# Altium PCB pmu.PcbDoc
Units mil, origin at the board's own origin, x right, y up, seen from the top; angles counter-clockwise.
Board outline 1870 x 900 mil, 2 copper layers (Top Layer, Bottom Layer); 17 components, 11 nets, 44 pads, 0 vias.
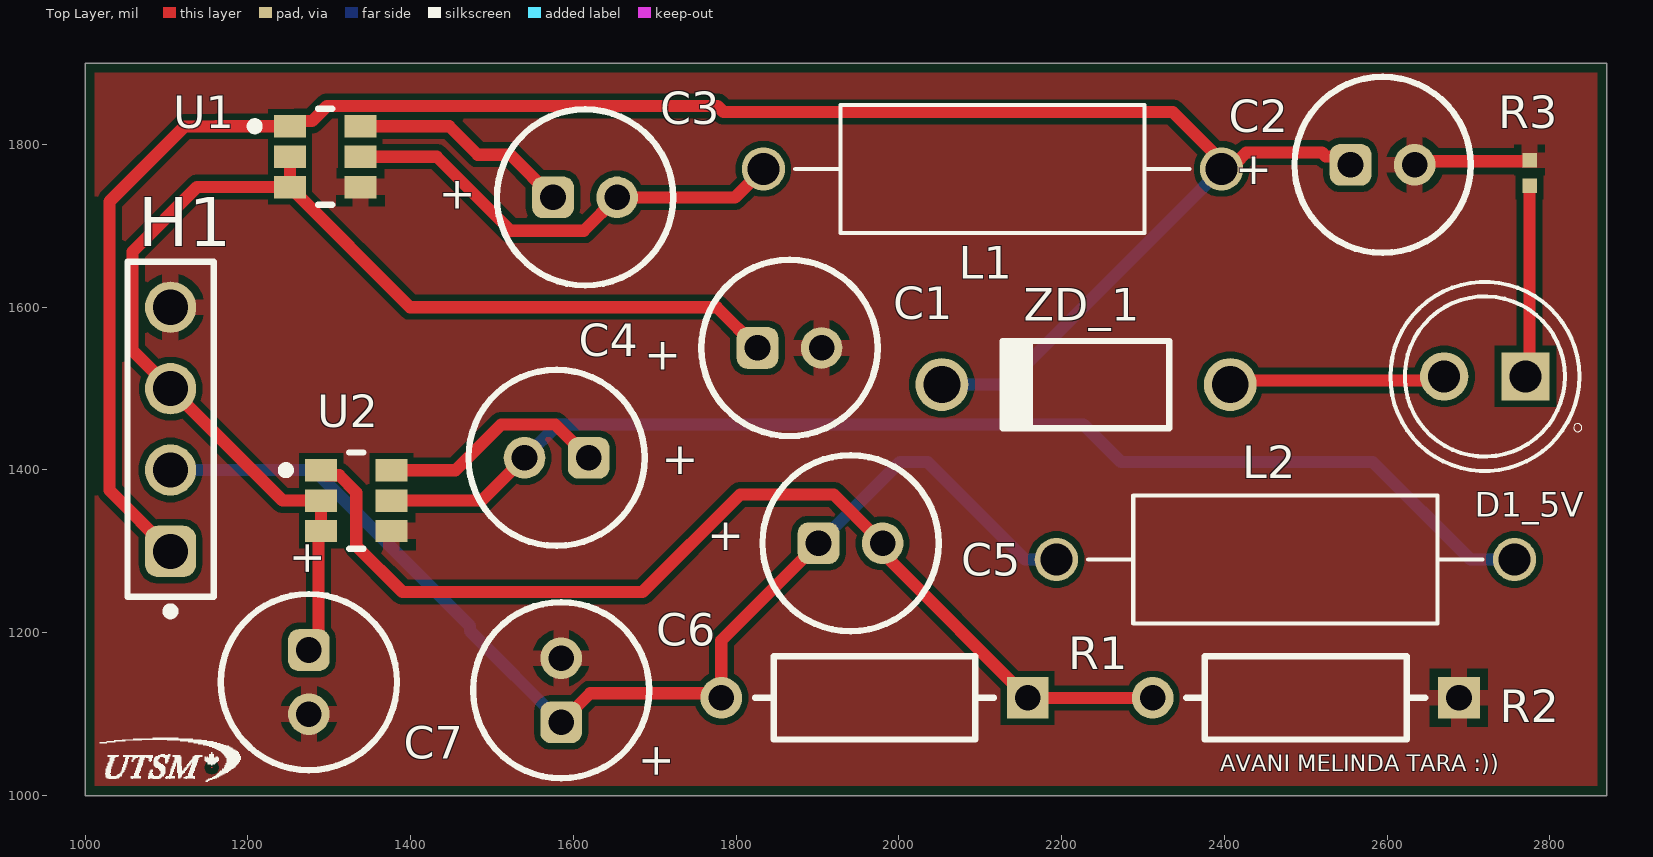
[diagram p0: Top Layer view]
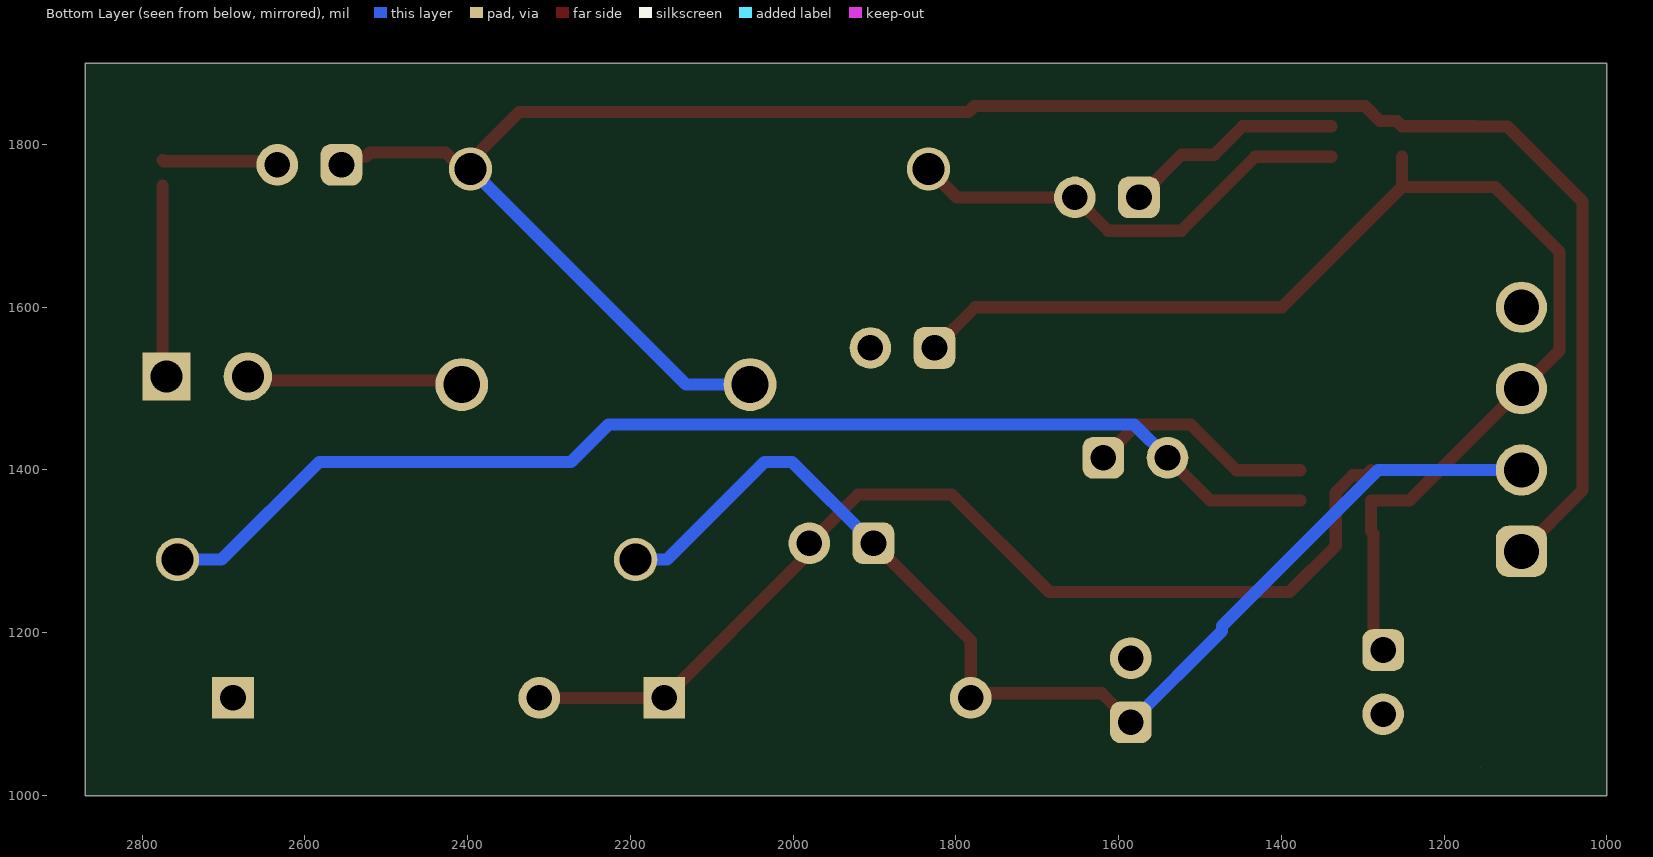
[diagram p1: Bottom Layer view, seen from below]

## Layer stack, top to bottom
Top Solder: solder mask 0.4, Solder Resist, Dk 3.5
Top Layer: signal copper 1.4
Dielectric 1: dielectric 12.6, FR-4, Dk 4.8
Bottom Layer: signal copper 1.4
Bottom Solder: solder mask 0.4, Solder Resist, Dk 3.5

## Board outline
1000,1000 2870,1000 2870,1900 1000,1900

## Design rules (kind name [scope] priority, off if disabled: settings)
BoardOutlineClearance [All] p1: gap=11.81 ignorepadtopadclearanceinfootprint=FALSE except(15.75: Arc-SplitBarrior Arc-SplitContinuation Track-SplitBarrior Track-SplitContinuation SMDPad-SplitBarrior SMDPad-SplitContinuation THPad-SplitBarrior THPad-SplitContinuation Via-SplitBarrior Via-SplitContinuation Fill-SplitBarrior Fill-SplitContinuation Poly-SplitBarrior Poly-SplitContinuation Region-SplitBarrior Region-SplitContinuation Text-SplitBarrior Text-SplitContinuation)
Clearance "Clearance Different Nets" [All] p1: gap=7.87 ignorepadtopadclearanceinfootprint=FALSE except(3.5: Arc-Arc Arc-Track Arc-SMDPad Track-Track Track-SMDPad; 5: SMDPad-SMDPad SMDPad-Via THPad-Via Via-Via; 10: Arc-Via Arc-Text Track-Via Track-Text SMDPad-Text THPad-Text Via-Text Fill-Text Poly-Text Region-Text Text-Text; 19.68: THPad-THPad Via-Hole)
Clearance "Clearance Same Nets" [All] p2: gap=7.87 ignorepadtopadclearanceinfootprint=FALSE except(3.5: Arc-Arc Arc-Track Arc-SMDPad Track-Track Track-SMDPad SMDPad-SMDPad; 5: SMDPad-Via THPad-Via; 10: Arc-Via Arc-Text Track-Via Track-Text SMDPad-Text THPad-Text Via-Via Via-Text Fill-Text Poly-Text Region-Text Text-Text)
Clearance "Clearance Bottom Layer" [OnLayer('Bottom Layer')] p3: gap=8 ignorepadtopadclearanceinfootprint=TRUE except(10: Arc-Text Track-Text SMDPad-Text THPad-Text Via-Text Fill-Text Poly-Text Region-Text Text-Text)
Clearance "Clearance Top Layer" [OnLayer('Top Layer')] p4: gap=8 ignorepadtopadclearanceinfootprint=TRUE except(10: Arc-Text Track-Text SMDPad-Text THPad-Text Via-Text Fill-Text Poly-Text Region-Text Text-Text)
HoleSize [All] p1: absolutevalues=TRUE maxlimit=248.03 minlimit=7.87 maxpercent=80.000 minpercent=20.000
MinimumAnnularRing [All] p1: minimumring=5.12
MinimumSolderMaskSliver [All] p1: minsoldermaskwidth=3.94
PolygonConnect PolygonConnect_1 [All] p1: thpad.connectstyle=Relief thpad.reliefconductorwidth=20 thpad.reliefentries=4 thpad.polygonreliefangle="90 Angle" thpad.airgapwidth=10 smdpad.connectstyle=Relief smdpad.reliefconductorwidth=20 smdpad.reliefentries=4 smdpad.polygonreliefangle="90 Angle" smdpad.airgapwidth=10 via.connectstyle=Direct via.reliefconductorwidth=20 via.reliefentries=4 via.polygonreliefangle="90 Angle" via.airgapwidth=10
RoutingCorners [All] p1: cornerstyle=Round minsetback=100 maxsetback=100
RoutingVias [All] p1: holewidth=19.68 width=39.37 viastyle="Through Hole" minholewidth=7.87 minwidth=13.78 maxholewidth=39.37 maxwidth=78.74
SilkToSilkClearance [All] p1: silktosilkclearance=3.94
SilkToSolderMaskClearance [IsPad] p1: minsilkscreentomaskgap=3.94 clearancetoexposedcopper=TRUE
SolderMaskExpansion [All] p1: expansion=4 istentingtop=FALSE
SupplyNets "Schematic Supply Nets" [InNet('GND')] p1: voltage=0.000
Width [All] p1: maxlimit=100 minlimit=3.5 preferedwidth=15
25 further rules are at their usual default settings.

## Components (designator, comment, footprint, x,y, rotation, side; value= is the part's Value field where it differs from the comment)
C1 "860020672005" WCAP-ATG5_D5H11 -48134.37,-48450 r180 top
C2 "860020672005" WCAP-ATG5_D5H11 -47405.63,-48225 r180 top
C3 "860020672005" WCAP-ATG5_D5H11 -48385.63,-48265 r180 top
C4 "860020672005" WCAP-ATG5_D5H11 51579.37,51415 r0 top
C5 "860020672005" WCAP-ATG5_D5H11 -48059.37,-48690 r180 top
C6 "860020672005" WCAP-ATG5_D5H11 51585,-48870.63 r270 top
C7 "860020672005" WCAP-ATG5_D5H11 -48725,51139.37 r90 top
D1_5V "WP7113ID" LED_WP7113ID 2720,1515 r180 top (schematic designator D1)
H1 "61300411121" 61300411121 1105,1450 r90 top locked
L1 "B78108E1472K009" INDAD1430W80L950D400 2115,1770 r0 top
L2 "B78108E1472K009" INDAD1430W80L950D400 2475,1290 r180 top
R1 "PCF14JT7K50" FP-CF14-MFG 1970,1120 r180 top
R2 "PCF14JT7K50" FP-CF14-MFG 2500,1120 r180 top
R3 "ERJ2GE0R00X" RESC1005X40X25LL05T05 2775,1765 r270 top
U1 "AP63205WU-7" FP-TSOT26-MFG 1295,1785 r0 top
U2 "AP63200WU-7" FP-TSOT26-MFG 1333.29,1362.4 r0 top
ZD_1 "1N4742A" FAIR-DO-41-2_V 2230,1505 r180 top

## Footprints (in the part's own frame and the unit in brackets; to place one, negate y for a bottom-side part, rotate by r counter-clockwise, add the part's x,y. Pads: shape width x height; smd on the part's side, far side on the other; paste and mask are expansions set on the pad)
61300411121 [mm] "Pin Header, pitch 2.54 mm, THT, Vertical, single row, 4p"
  rrect50% 1.6x1.6 hole 1.1: 1(-3.81,0)
  round 1.6 hole 1.1: 2(-1.27,0) 3(1.27,0) 4(3.81,0)
  silkscreen extent -5.8,-1.35 5.23,1.35, body extent -5.08,-1.27 5.08,1.27, height 8.57
FAIR-DO-41-2_V [mm] "2-Leads, Axial leaded, Body 2.72x5.2mm, Pin Spacing 9mm"
  round 1.65 hole 1.15: 1(-4.5,0) 2(4.5,0)
  silkscreen extent -2.6,-1.36 2.6,1.36, body extent -4.93,-1.36 4.93,1.36, height 2.71
FP-CF14-MFG [mm]
  rect 1.3x1.3 hole 0.8 paste-2539.97 mask+0: 1(-4.78,0)
  round 1.3 hole 0.8 paste-2539.97 mask+0: 2(4.78,0)
  silkscreen extent -3.73,-1.3 3.73,1.3, body extent -5.53,-1.4 5.53,1.4, height 0.25
FP-TSOT26-MFG [mm]
  rect 1x0.7 smd paste+0 mask+0: 1(-1.099,0.95) 2(-1.099,0) 3(-1.099,-0.95) 4(1.099,-0.95) 5(1.099,0) 6(1.099,0.95)
  silkscreen extent -2.32,-1.5 0.22,1.5, body extent -1.7,-1.6 1.7,1.6, height 0.25
INDAD1430W80L950D400 [mm]
  round 1.35 hole 1: 1(-7.15,0) 2(7.15,0)
  silkscreen extent -6.15,-2 6.15,2, body extent -7.55,-2 7.55,2, height 4
LED_WP7113ID [mm]
  round 1.508 hole 1: A(1.27,0)
  rect 1.508x1.508 / inner round 1.508 / far side rect 1.508x1.508 hole 1: C(-1.27,0)
  silkscreen extent -3.03,-2.95 2.95,2.95, body extent -2.5,-2.95 2.95,2.95, height 9.6
RESC1005X40X25LL05T05 [mm] "Chip Resistor, 2-Leads, Body 1.05x0.55mm, IPC High Density"
  rect 0.45x0.45 smd: 1(-0.4,0) 2(0.4,0)
  body extent -0.53,-0.28 0.53,0.28, height 0.4
WCAP-ATG5_D5H11 [mm] "Aluminum Electrolytic Capacitors, 5x11mm"
  rrect50% 1.3x1.3 hole 0.8: 1(-1269,-1270)
  round 1.3 hole 0.8: 2(-1271,-1270)
  silkscreen extent -1272.75,-1272.75 -1267.25,-1267.25, body extent -1272.49,-1272.5 -1267.5,-1267.5, height 11.31

## Part data
C1 C2 C3 C4 C5 C6 C7: library part CMP-03913-53914228-1, "860020672005 WCAP-ATG5 Aluminum Electrolytic Capacitors", Capacitance=1µF, Case/Package=Radial, ESR (Equivalent Series Resistance)=39.553Ω, Leakage Current=3µA, Max Operating Temperature=105°C, Min Operating Temperature=-40°C, Ripple Current=13mA, Tolerance=20%, Voltage Rating=50V, Diameter=5mm, Height=11mm, Height - Seated (Max)=12.4968mm, Hole Diameter=800µm, Lead Pitch=2.0066mm, Length=11mm, Life (Hours)=2000hours, Mount="Through Hole", NexarPartId=53914228, Packaging="Tape & Box (TB)", Pitch=2mm, Polarity=Polar, REACH SVHC=Unknown, RoHS=Compliant, Voltage Rating (DC)=50V
D1_5V: "Red 617nm LED Indication - Discrete 2V Radial", Package="Radial Kingbright", Availability="In Stock", Check_prices=https://www.snapeda.com/parts/WP7113ID/Kingbright/view-part/?ref=eda, MF=Kingbright, MP=WP7113ID, Price=None, Purchase-URL=https://pricing.snapeda.com/search/part/WP7113ID/?ref=eda, SnapEDA_Link=https://www.snapeda.com/parts/WP7113ID/Kingbright/view-part/?ref=snap
H1: "WR-PHD Pin Header, THT, Vertical, pitch 2.54mm, 1 Row, 4P", Contact Resistance=20mOhm, Manufacturer="Wurth Elektronik", Operating Temperature Max=105°C, Operating Temperature Min=-40°C, Rated Current=3A, Withstanding Voltage=500V, Working Voltage=250V, Category="Board-to-Board Connectors", ComponentLink1Description="Website Link", ComponentLink1URL=https://www.we-online.com/redexpert/article/61300411121?ad, ComponentLink2Description="Datasheet Link", ComponentLink2URL=https://www.we-online.com/redexpert/spec/61300411121?ad, Gender="Pin Header", Manufacturer Part Number=61300411121, Match Code=WR-PHD, Mount="Through Hole", Number of Pins=4, Number of Rows=1, Orientation=Vertical, Packaging=Bag, Pitch=2.54mm
L1 L2: "4.7 ÂµH Unshielded Drum Core, Wirewound Inductor 2.75 A 85mOhm Max Axial", Package=None, Check_prices=https://www.snapeda.com/parts/B78108E1472K009/EPCOS/view-part/?ref=eda, Digi-Key_Part_Number=495-76025-1-ND, MF=EPCOS, MP=B78108E1472K009, Purchase-URL=https://pricing.snapeda.com/search/part/B78108E1472K009/?ref=eda, SnapEDA_Link=https://www.snapeda.com/parts/B78108E1472K009/EPCOS/view-part/?ref=snap
R1 R2: library part CMP-26528-000003-1, "RES 7.5K OHM 1/4W 5% AXIAL", Case/Package=Axial, Max Operating Temperature=155°C, Max Power Dissipation=250mW, Min Operating Temperature=-55°C, Resistance=7.5kR, Resistor Type="Carbon Film", Temperature Coefficient=-400ppm/°C, Tolerance=5%, Contact Plating=Tin, Diameter=2.3mm, Features="Flame Retardant Coating", Lead Free="Lead Free", Length=0.256inch, Mount="Through Hole", Number of Terminations=2, Packaging="Tape and Reel", Power Rating=250mW, Radiation Hardening=No, RoHS Compliant=Yes, Series=CF
R3: library part CMP-2000-07451-1, "Chip Resistor, 0 Ohm, 0.1 W, -55 to 155 degC, 0402 (1005 Metric), RoHS, Tape and Reel", Case Code (Imperial)=0402, Case Code (Metric)=1005, Manufacturer=Panasonic, Max Operating Temperature=155degC, Max Power Dissipation=100mW, Min Operating Temperature=-55degC, Package Description="2-Pin Surface Mount Device, Body 1 x 0.5 mm", Package Quantity=1, Package Reference=402, Resistance=0mOhm, Temperature Coefficient=600ppm/��C, Tolerance=5%, Voltage Rating=50V, Case/Package=0402, Composition=ThickFilm, Contact Plating=Tin, Datasheet URL=https://industrial.panasonic.com/cdbs/www-data/pdf/RDA0000/AOA0000C301.pdf, Datasheet Version=03/2015, Depth=0.5mm, Height=0.35mm, Lead Free=LeadFree, Length=1mm, Manufacturer URL=http://www.panasonic.com/, Military Standard=Not, Mount=SurfaceMount, Mounting Technology=SurfaceMount, Number of Terminations=2, Packaging=TapeandReel, Power Rating=100mW, Radiation Hardening=No, REACH SVHC=NoSVHC, RoHSCompliant=True, Termination=SMD/SMT, Voltage Rating (DC)=50V, Width=0.02inch
U1: library part CMP-12757-000001-1, "IC REG BUCK 5V 2A TSOT26", Ambient Temperature Range High=+85°C, Ambient Temperature Range Low=-40°C, Manufacturer="Diodes Inc.", Max Junction Temp=+160°C, Max Supply Voltage=32V, Min Supply Voltage=3.8V, Nominal Supply Current=22uA, Output Current=2A, Output Voltage=5V, Package=TSOT26, Switching Frequency=1100kHz, Temperature="-40°C to +85°C", Automotive=No, Category=IC, ComponentLink2Description=Datasheet, ComponentLink2URL=https://www.diodes.com/assets/Datasheets/AP63200-AP63201-AP63203-AP63205.pdf, Device Class L1="Integrated Circuits (ICs)", Device Class L2="Power Management ICs", Device Class L3="Voltage Regulators - Switching", Digikey Description="IC REG BUCK 5V 2A TSOT26", Footprint Url=https://www.diodes.com/assets/Package-Files/TSOT26.pdf, Height=1mm, Lead Free=Yes, Manufacturer Part Number=AP63205WU-7, Max Duty Cycle=100%, Number Of Outputs=1, Octopart=https://octopart.com/ap63205wu-7-diodes+inc.-98099551, Output Type=Fixed, RoHS=TRUE, Standoff Height=0.01mm, Switching Topology=Buck, Temperature Range High=+85°C, Temperature Range Low=-40°C
U2: library part CMP-12757-000010-1, "IC REG BUCK ADJUSTABLE 2A TSOT26", Ambient Temperature Range High=+85°C, Ambient Temperature Range Low=-40°C, Manufacturer="Diodes Inc.", Max Junction Temp=+160°C, Max Supply Voltage=32V, Min Supply Voltage=3.8V, Nominal Supply Current=22uA, Output Current=2A, Package=TSOT26, Switching Frequency=500kHz, Temperature="-40°C to +85°C", Automotive=No, Category=IC, ComponentLink2Description=Datasheet, ComponentLink2URL=https://www.diodes.com/assets/Datasheets/AP63200-AP63201-AP63203-AP63205.pdf, Device Class L1="Integrated Circuits (ICs)", Device Class L2="Power Management ICs", Device Class L3="Voltage Regulators - Switching", Digikey Description="IC REG BUCK ADJUSTABLE 2A TSOT26", Footprint Url=https://www.diodes.com/assets/Package-Files/TSOT26.pdf, Height=1mm, Ipc Land Pattern Name=SOT95P280X100-6, Lead Free=Yes, Manufacturer Part Number=AP63200WU-7, Mouser Description="AP63200 Series 1.2 V 2 A Adjustable Synchronous Buck Converter - TSOT-26", Number Of Outputs=1, Octopart=https://octopart.com/ap63200wu-7-diodes+inc.-98099548, Output Type=AdjustableProgrammable, RoHS=TRUE, Standoff Height=0.01mm, Switching Topology=Buck, Temperature Range High=+85°C, Temperature Range Low=-40°C
ZD_1: library part CMP-0892-00001-1, "Zener Diode, 12V, 1W, 5%, -65 to 200 degC, 2-Pin DO-41, Body 2.72 x 5.2 mm, RoHS", Manufacturer="Fairchild Semiconductor", Operating and Storage Temperature Range="-65 to 200 degC", Test Current IZ (mA)=21, Tolerance=5%, ComponentLink1Description="Manufacturer URL", ComponentLink1URL=http://www.fairchildsemi.com/, ComponentLink2Description=Datasheet, ComponentLink2URL=http://www.fairchildsemi.com/ds/1N/1N4744A.pdf, ComponentLink3Description="Package Specification", ComponentLink3URL=http://www.fairchildsemi.com/dwg/DO/DO41A.pdf, DatasheetVersion="Rev. H3", IR (uA)=5, Mounting Technology="Through Hole", PackageDescription="2-Pin Axial leaded, Body 2.72 x 5.2 mm, Lead Spread 25.4 mm", PackageReference=DO-41-2, PackageVersion="Rev. 2", PartNumber=1N4742A, PD (W)=1, RoHS=TRUE, VZ (Max.) (V)=12.6, VZ (Min.) (V)=11.4, ZZ (Max) (ohm)=8

## Nets (pads, with @x,y where several pads share a name; then routed paths per layer and width w, separated by ;. In a path a pad name is that pad's centre, name@x,y a point inside that pad or via, vN(x,y) a via of type N, cw(c..) or ccw(c..) an arc to the next point about the centre after c; other vN are vias at no path point)
GND: C1.2 C2.2 C6.2 C7.2 H1.4 R2.1 R3.1 U1.4 U2.4 | length 147.4
  Top Layer w15: C2.2@2633.74,1771.26 C2.2 2638.13,1779.39 2773.64,1779.39 R3.1
NetC3_1: C3.1 U1.6 | length 272.9
  Top Layer w15: U1.6 1447.52,1822.4 1482.52,1787.4 1522.6,1787.4 C3.1
NetC3_2: C3.2 L1.1 U1.5 | length 564.4
  Top Layer w15: U1.5 1431.99,1785 1522.95,1694.04 1612.78,1694.04 C3.2 1798.5,1735 L1.1
NetC4_1: C4.1 U2.6 | length 282.4
  Top Layer w15: U2.6 1455.19,1399.8 1511.35,1455.96 1577.78,1455.96 C4.1
NetC4_2: C4.2 L2.1 U2.5 | length 1487.4
  Top Layer w15: U2.5 1487.4,1362.4 C4.2
  Bottom Layer w15: C4.2 1580.96,1455.96 2226.86,1455.96 2272.83,1410 2582.24,1410 2702.24,1290 L2.1
NetC5_2: C5.2 R1.1 R2.2 U2.1 | length 1282.5
  Top Layer w15: U2.1 1296.28,1393.52 1312.19,1393.52 1333.29,1372.43 1333.29,1306.71 1390,1250 1685,1250 1805,1370 1920,1370 C5.2 1980,1300.21 1990.72,1289.49 1990.72,1287.47 R1.1 R2.2
NetD1_A: D1_5V.A ZD_1.1 | length 267
  Top Layer w15: ZD_1.1 2412.17,1510 2665,1510 D1_5V.A
NetD1_C: D1_5V.C R3.2 | length 236.3
  Top Layer w15: D1_5V.C 2775,1520 R3.2
Vin: C1.1 C7.1 H1.3 U1.2 U1.3 U2.2 U2.3 | length 1539.7
  Top Layer w15: U1.2 U1.3 ; C7.1 1286.71,1190.45 1286.71,1321.71 U2.3 U2.2 1242.6,1362.4 H1.3 1058.13,1546.87 1058.13,1668.13 1137.6,1747.6 U1.3 ; C1.1 1776.26,1600 1399.31,1600 U1.3
Vout_a: C2.1 H1.1 L1.2 U1.1 ZD_1.2 | length 2534.6
  Top Layer w15: H1.1 1030,1375 1030,1730 1122.2,1822.2 1160.49,1822.2 1160.69,1822.4 U1.1 1257.99,1828.68 1278.68,1828.68 1297.18,1847.18 1777.27,1847.18 1784.45,1840 2336.5,1840 2396.5,1780 L1.2 ; L1.2@2399.2,1777.3 2414.12,1777.3 2426.82,1790 2520,1790 2524.63,1785.37 2544.63,1785.37 C2.1
  Bottom Layer w15: ZD_1.2 2131.5,1505 L1.2
Vout_b: C5.1 C6.1 H1.2 L2.2 R1.2 | length 1447.2
  Top Layer w15: C6.1 1620.63,1125.63 1776.18,1125.63 R1.2@1779,1122.82 ; R1.2 R1.2@1779,1122.82 ; C5.1 1781.81,1190.55 1781.81,1125.63 R1.2@1779,1122.82
  Bottom Layer w15: H1.2 1281.26,1400 1472.81,1208.45 1472.81,1202.19 C6.1 ; C5.1 2001.26,1410 2035.08,1410 2155.08,1290 L2.2

## Polygon pours and split planes (outlines as drawn)
GND on Top Layer "GND_L01_P000" (solid, pour order 0): 1000,1900 2870,1900 2870,1000 2865,1005 995,1005

## Other copper
Top Layer:
  region: 1156.12,1033.88 1155,1033.88 1155,1035 1156.12,1035

## Silkscreen, mask and mechanical layers (free items; w line width, h text height)
Top Overlay:
  drawing of 7 lines, arcs and shapes, not listed
  text "AVANI MELINDA TARA :))" at 2395,1030 h20

## Text inside footprints (layer, text, board x,y; h text height)
C1: Top Overlay "+" at 1732.82,1557.18 h39.37 r180
C2: Top Overlay "+" at 2458.74,1785 h39.37 r180
C3: Top Overlay "+" at 1480,1755 h39.37 r180
C4: Top Overlay "+" at 1708.74,1395 h39.37
C5: Top Overlay "+" at 1810,1335 h39.37 r180
C6: Top Overlay "+" at 1685,1065 h39.37 r270
C7: Top Overlay "+" at 1290,1268.74 h39.37 r90